# Altium PCB Lite Carrier for Mu.PcbDoc (part 5 of 15)
Units mm, origin at the board's own origin, x right, y up, seen from the top; angles counter-clockwise.
Board outline 146 x 102 mm, 20 copper layers (F.Cu, F.Mask, B.Cu, B.Mask, In1.Cu, F.SilkS, In2.Cu, B.SilkS, F.Adhes, B.Adhes, F.Paste, B.Paste, Dwgs.User, Cmts.User, Eco1.User, Eco2.User, Edge.Cuts, Margin, B.CrtYd, F.CrtYd); 254 components, 382 nets, 1258 pads, 1020 vias.
Unrouted connection lines stored in the file: 113.
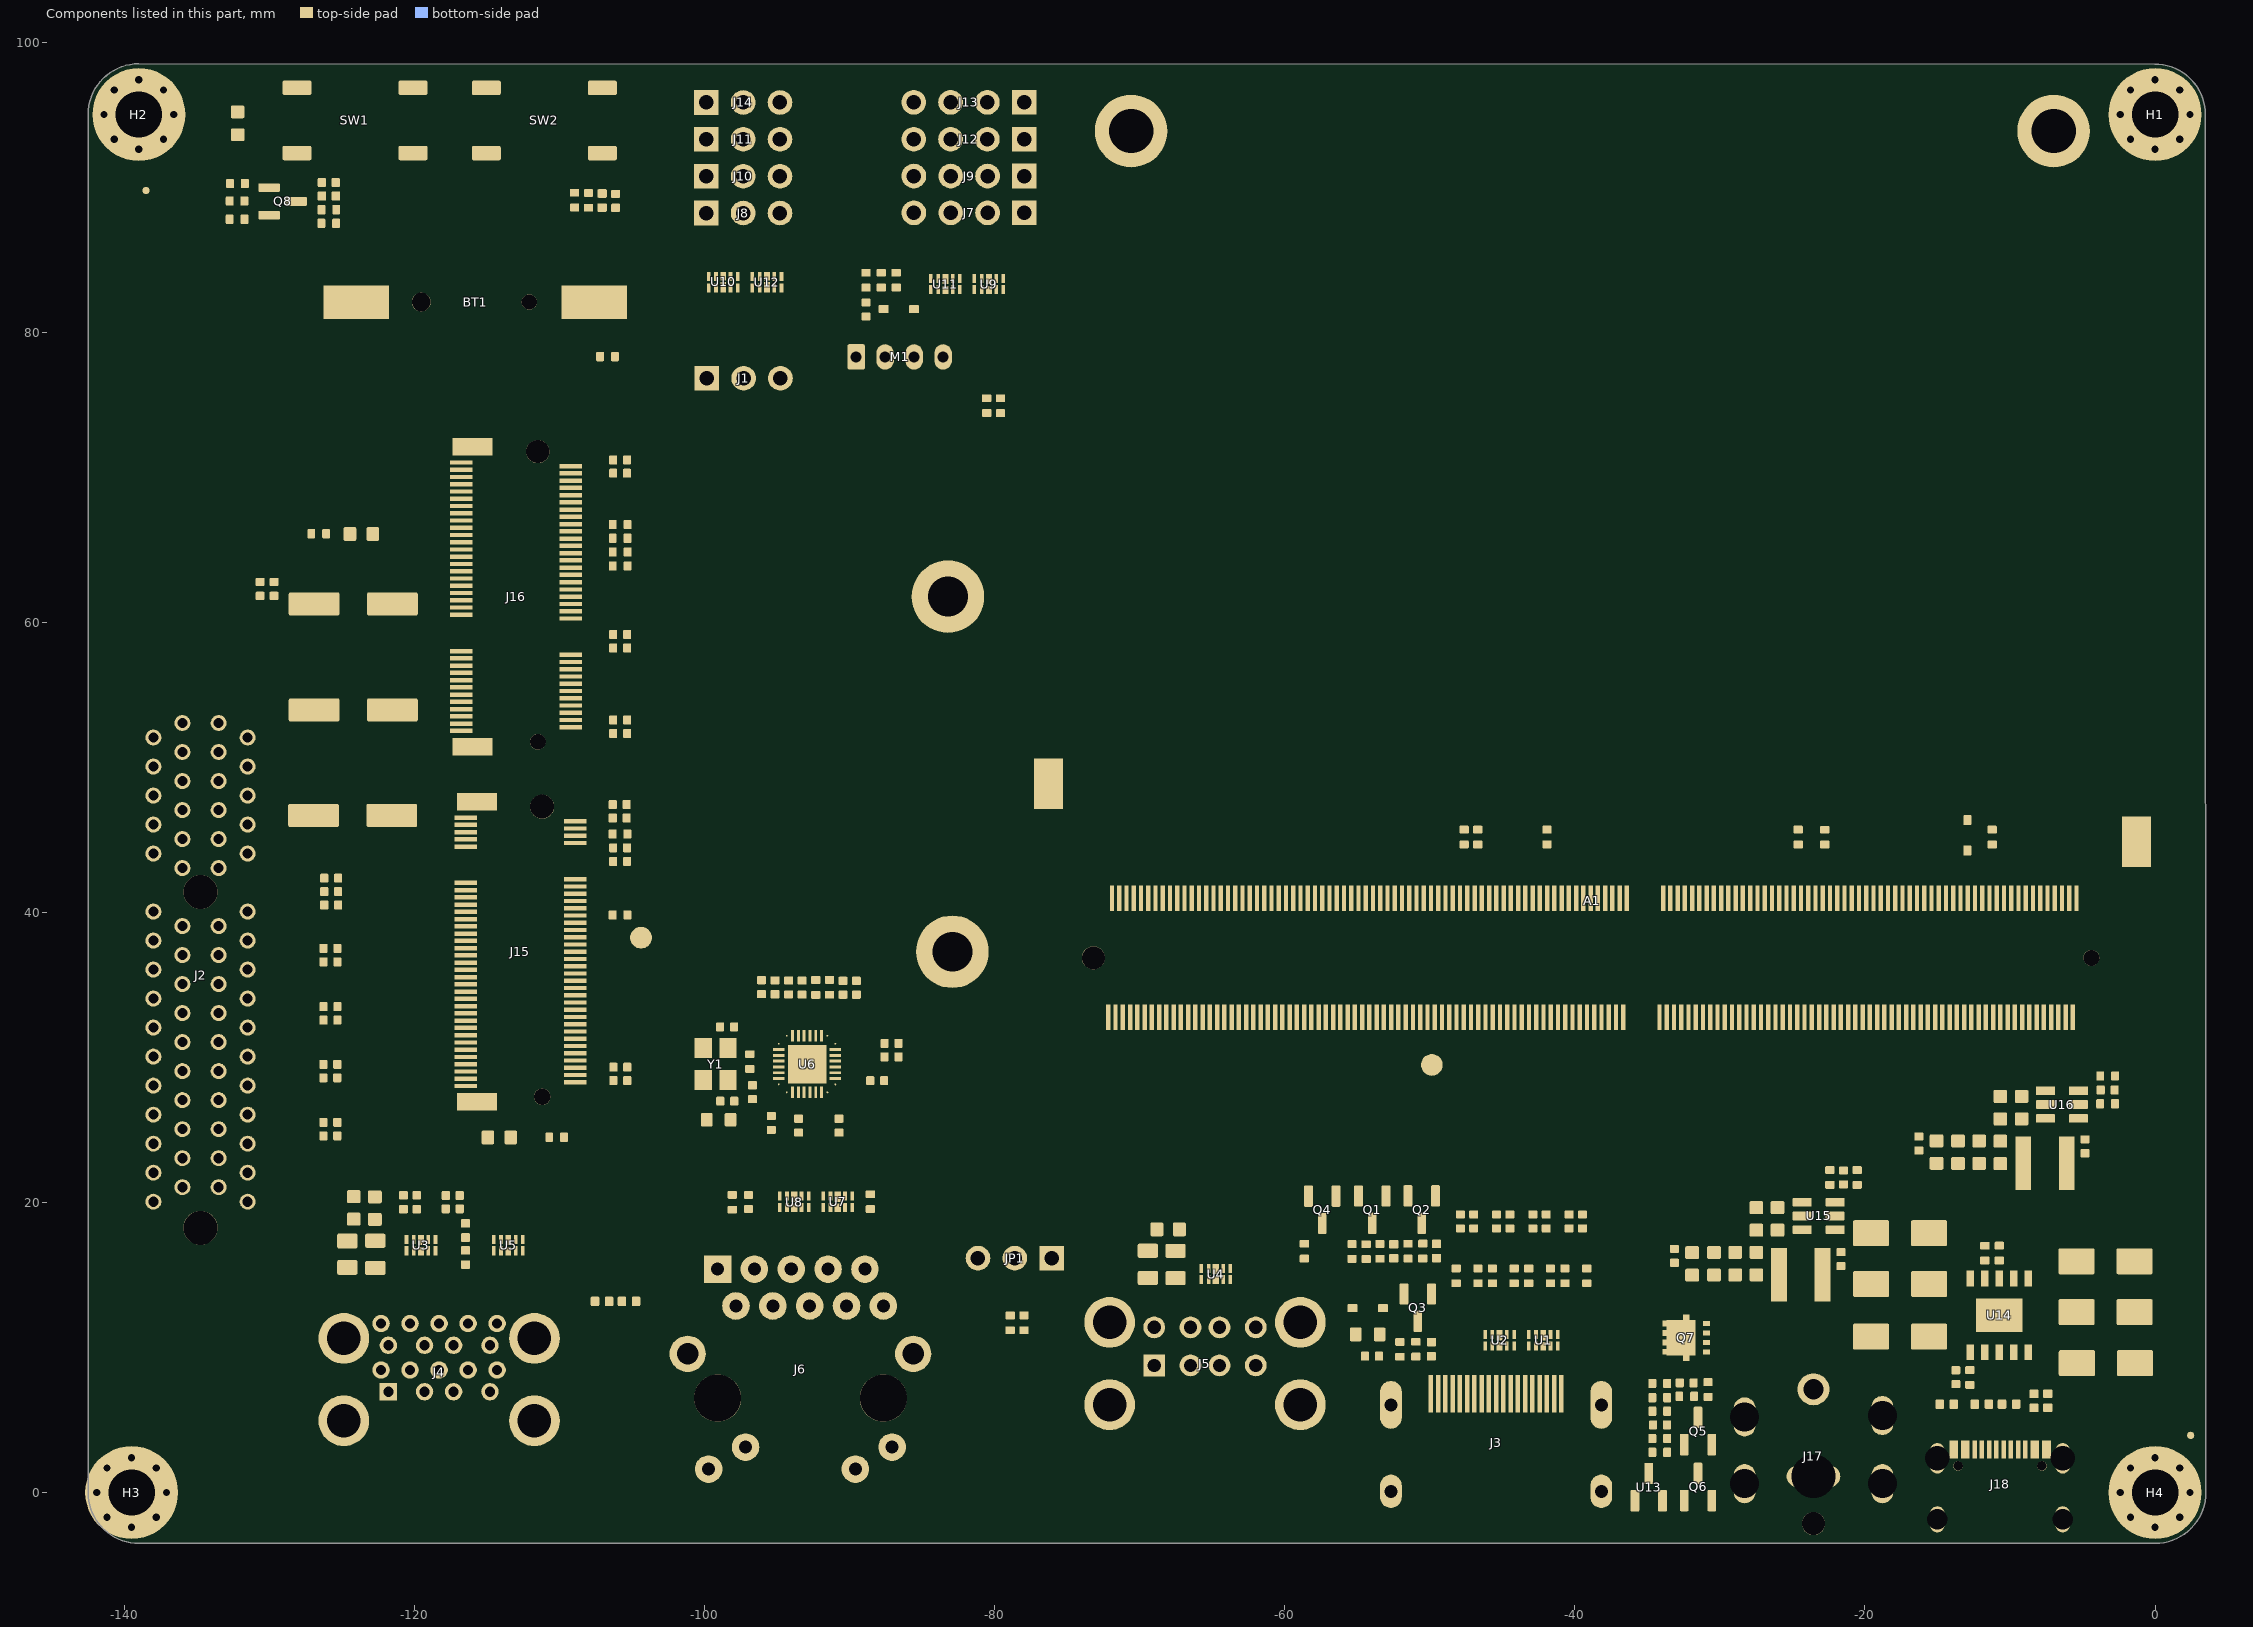
[diagram p16: the components of this part, seen from the top]

## Design rules (kind name [scope] priority, off if disabled: settings) (continued)
PolygonConnect Polygon_F.Cu-+3V3-33_ConnectDirect [IsNamedPolygon('F.Cu-+3V3-33')] p867: connectstyle=Direct reliefconductorwidth=0.254 reliefentries=4 polygonreliefangle="90 Angle" airgapwidth=0.254
PolygonConnect Polygon_F.Cu-GND-67_ConnectDirect [IsNamedPolygon('F.Cu-GND-67')] p868: connectstyle=Direct reliefconductorwidth=0.254 reliefentries=4 polygonreliefangle="90 Angle" airgapwidth=0.254
PolygonConnect "Polygon_F.Cu-/LattePanda Module/USB_2_P7--1_ConnectDirect" [IsNamedPolygon('F.Cu-/LattePanda Module/USB_2_P7--1')] p869: connectstyle=Direct reliefconductorwidth=0.254 reliefentries=4 polygonreliefangle="90 Angle" airgapwidth=0.254
PolygonConnect Polygon_F.Cu-GND-66_ConnectDirect [IsNamedPolygon('F.Cu-GND-66')] p870: connectstyle=Direct reliefconductorwidth=0.254 reliefentries=4 polygonreliefangle="90 Angle" airgapwidth=0.254
PolygonConnect Polygon_F.Cu-/HDMI/TMDS_D2+-3_ConnectDirect [IsNamedPolygon('F.Cu-/HDMI/TMDS_D2+-3')] p871: connectstyle=Direct reliefconductorwidth=0.254 reliefentries=4 polygonreliefangle="90 Angle" airgapwidth=0.254
PolygonConnect Polygon_F.Cu-+5V-2_ConnectDirect [IsNamedPolygon('F.Cu-+5V-2')] p872: connectstyle=Direct reliefconductorwidth=0.254 reliefentries=4 polygonreliefangle="90 Angle" airgapwidth=0.254
PolygonConnect Polygon_F.Cu-GND-65_ConnectDirect [IsNamedPolygon('F.Cu-GND-65')] p873: connectstyle=Direct reliefconductorwidth=0.254 reliefentries=4 polygonreliefangle="90 Angle" airgapwidth=0.254
PolygonConnect Polygon_F.Cu-GND-64_ConnectDirect [IsNamedPolygon('F.Cu-GND-64')] p874: connectstyle=Direct reliefconductorwidth=0.254 reliefentries=4 polygonreliefangle="90 Angle" airgapwidth=0.254
PolygonConnect Polygon_F.Cu-GND-63_ConnectDirect [IsNamedPolygon('F.Cu-GND-63')] p875: connectstyle=Direct reliefconductorwidth=0.254 reliefentries=4 polygonreliefangle="90 Angle" airgapwidth=0.254
PolygonConnect Polygon_F.Cu-Net-(Q7-G)-4_ConnectDirect [IsNamedPolygon('F.Cu-Net-(Q7-G)-4')] p876: connectstyle=Direct reliefconductorwidth=0.254 reliefentries=4 polygonreliefangle="90 Angle" airgapwidth=0.254
PolygonConnect "Polygon_F.Cu-/PCIe x4/PCIE30_TX1_N-1_ConnectDirect" [IsNamedPolygon('F.Cu-/PCIe x4/PCIE30_TX1_N-1')] p877: connectstyle=Direct reliefconductorwidth=0.254 reliefentries=4 polygonreliefangle="90 Angle" airgapwidth=0.254
PolygonConnect Polygon_F.Cu-/GPIO/SOC_UART2_RX-2_ConnectDirect [IsNamedPolygon('F.Cu-/GPIO/SOC_UART2_RX-2')] p878: connectstyle=Direct reliefconductorwidth=0.254 reliefentries=4 polygonreliefangle="90 Angle" airgapwidth=0.254
PolygonConnect "Polygon_F.Cu-/LattePanda Module/HSIO_11_TX-_ConnectDirect" [IsNamedPolygon('F.Cu-/LattePanda Module/HSIO_11_TX-')] p879: connectstyle=Direct reliefconductorwidth=0.254 reliefentries=4 polygonreliefangle="90 Angle" airgapwidth=0.254
PolygonConnect Polygon_F.Cu-Net-(Q1-D)-1_ConnectDirect [IsNamedPolygon('F.Cu-Net-(Q1-D)-1')] p880: connectstyle=Direct reliefconductorwidth=0.254 reliefentries=4 polygonreliefangle="90 Angle" airgapwidth=0.254
PolygonConnect Polygon_F.Cu-/USB2.0&USB3.0/CON_USB3_SSRX_P-1_ConnectDirect [IsNamedPolygon('F.Cu-/USB2.0&USB3.0/CON_USB3_SSRX_P-1')] p881: connectstyle=Direct reliefconductorwidth=0.254 reliefentries=4 polygonreliefangle="90 Angle" airgapwidth=0.254
PolygonConnect Polygon_F.Cu-/USB2.0&USB3.0/CON_USB4_SSTX_N-2_ConnectDirect [IsNamedPolygon('F.Cu-/USB2.0&USB3.0/CON_USB4_SSTX_N-2')] p882: connectstyle=Direct reliefconductorwidth=0.254 reliefentries=4 polygonreliefangle="90 Angle" airgapwidth=0.254
PolygonConnect "Polygon_F.Cu-/LattePanda Module/HSIO_2_TX+-1_ConnectDirect" [IsNamedPolygon('F.Cu-/LattePanda Module/HSIO_2_TX+-1')] p883: connectstyle=Direct reliefconductorwidth=0.254 reliefentries=4 polygonreliefangle="90 Angle" airgapwidth=0.254
PolygonConnect Polygon_F.Cu-/GPIO/I2C4_SCL-2_ConnectDirect [IsNamedPolygon('F.Cu-/GPIO/I2C4_SCL-2')] p884: connectstyle=Direct reliefconductorwidth=0.254 reliefentries=4 polygonreliefangle="90 Angle" airgapwidth=0.254
PolygonConnect Polygon_F.Cu-VPullup-4_ConnectDirect [IsNamedPolygon('F.Cu-VPullup-4')] p885: connectstyle=Direct reliefconductorwidth=0.254 reliefentries=4 polygonreliefangle="90 Angle" airgapwidth=0.254
PolygonConnect Polygon_F.Cu-/USB2.0&USB3.0/CON_USB4_D_P-2_ConnectDirect [IsNamedPolygon('F.Cu-/USB2.0&USB3.0/CON_USB4_D_P-2')] p886: connectstyle=Direct reliefconductorwidth=0.254 reliefentries=4 polygonreliefangle="90 Angle" airgapwidth=0.254
PolygonConnect Polygon_F.Cu-GND-62_ConnectDirect [IsNamedPolygon('F.Cu-GND-62')] p887: connectstyle=Direct reliefconductorwidth=0.254 reliefentries=4 polygonreliefangle="90 Angle" airgapwidth=0.254
PolygonConnect Polygon_F.Cu-GND-61_ConnectDirect [IsNamedPolygon('F.Cu-GND-61')] p888: connectstyle=Direct reliefconductorwidth=0.254 reliefentries=4 polygonreliefangle="90 Angle" airgapwidth=0.254
PolygonConnect Polygon_F.Cu-GND-60_ConnectDirect [IsNamedPolygon('F.Cu-GND-60')] p889: connectstyle=Direct reliefconductorwidth=0.254 reliefentries=4 polygonreliefangle="90 Angle" airgapwidth=0.254
PolygonConnect Polygon_F.Cu-VPullup-3_ConnectDirect [IsNamedPolygon('F.Cu-VPullup-3')] p890: connectstyle=Direct reliefconductorwidth=0.254 reliefentries=4 polygonreliefangle="90 Angle" airgapwidth=0.254
PolygonConnect "Polygon_F.Cu-/LattePanda Module/HSIO_2_RX-_ConnectDirect" [IsNamedPolygon('F.Cu-/LattePanda Module/HSIO_2_RX-')] p891: connectstyle=Direct reliefconductorwidth=0.254 reliefentries=4 polygonreliefangle="90 Angle" airgapwidth=0.254
PolygonConnect "Polygon_F.Cu-/LattePanda Module/REFCLK0-_ConnectDirect" [IsNamedPolygon('F.Cu-/LattePanda Module/REFCLK0-')] p892: connectstyle=Direct reliefconductorwidth=0.254 reliefentries=4 polygonreliefangle="90 Angle" airgapwidth=0.254
PolygonConnect "Polygon_F.Cu-/LattePanda Module/HSIO_1_TX+-1_ConnectDirect" [IsNamedPolygon('F.Cu-/LattePanda Module/HSIO_1_TX+-1')] p893: connectstyle=Direct reliefconductorwidth=0.254 reliefentries=4 polygonreliefangle="90 Angle" airgapwidth=0.254
PolygonConnect Polygon_F.Cu-GND-59_ConnectDirect [IsNamedPolygon('F.Cu-GND-59')] p894: connectstyle=Direct reliefconductorwidth=0.254 reliefentries=4 polygonreliefangle="90 Angle" airgapwidth=0.254
PolygonConnect Polygon_F.Cu-GND-58_ConnectDirect [IsNamedPolygon('F.Cu-GND-58')] p895: connectstyle=Direct reliefconductorwidth=0.254 reliefentries=4 polygonreliefangle="90 Angle" airgapwidth=0.254
PolygonConnect Polygon_F.Cu-Net-(U15-BOOST)_ConnectDirect [IsNamedPolygon('F.Cu-Net-(U15-BOOST)')] p896: connectstyle=Direct reliefconductorwidth=0.254 reliefentries=4 polygonreliefangle="90 Angle" airgapwidth=0.254
PolygonConnect Polygon_F.Cu-/~{WAKE}-5_ConnectDirect [IsNamedPolygon('F.Cu-/~{WAKE}-5')] p897: connectstyle=Direct reliefconductorwidth=0.254 reliefentries=4 polygonreliefangle="90 Angle" airgapwidth=0.254
PolygonConnect Polygon_F.Cu-+3V3-32_ConnectDirect [IsNamedPolygon('F.Cu-+3V3-32')] p898: connectstyle=Direct reliefconductorwidth=0.254 reliefentries=4 polygonreliefangle="90 Angle" airgapwidth=0.254
PolygonConnect "Polygon_F.Cu-/Gigabit Ethernet/LED1_1000-1_ConnectDirect" [IsNamedPolygon('F.Cu-/Gigabit Ethernet/LED1_1000-1')] p899: connectstyle=Direct reliefconductorwidth=0.254 reliefentries=4 polygonreliefangle="90 Angle" airgapwidth=0.254
PolygonConnect Polygon_F.Cu-+BATT-2_ConnectDirect [IsNamedPolygon('F.Cu-+BATT-2')] p900: connectstyle=Direct reliefconductorwidth=0.254 reliefentries=4 polygonreliefangle="90 Angle" airgapwidth=0.254
PolygonConnect Polygon_F.Cu-/USB2.0&USB3.0/CON_USB3_SSTX_N_ConnectDirect [IsNamedPolygon('F.Cu-/USB2.0&USB3.0/CON_USB3_SSTX_N')] p901: connectstyle=Direct reliefconductorwidth=0.254 reliefentries=4 polygonreliefangle="90 Angle" airgapwidth=0.254
PolygonConnect Polygon_F.Cu-/USB2.0&USB3.0/CON_USB4_D_P-1_ConnectDirect [IsNamedPolygon('F.Cu-/USB2.0&USB3.0/CON_USB4_D_P-1')] p902: connectstyle=Direct reliefconductorwidth=0.254 reliefentries=4 polygonreliefangle="90 Angle" airgapwidth=0.254
PolygonConnect "Polygon_F.Cu-/LattePanda Module/HSIO_11_TX+_ConnectDirect" [IsNamedPolygon('F.Cu-/LattePanda Module/HSIO_11_TX+')] p903: connectstyle=Direct reliefconductorwidth=0.254 reliefentries=4 polygonreliefangle="90 Angle" airgapwidth=0.254
PolygonConnect Polygon_F.Cu-/PSU/PWR_C_D+-2_ConnectDirect [IsNamedPolygon('F.Cu-/PSU/PWR_C_D+-2')] p904: connectstyle=Direct reliefconductorwidth=0.254 reliefentries=4 polygonreliefangle="90 Angle" airgapwidth=0.254
PolygonConnect Polygon_F.Cu-+3V3-31_ConnectDirect [IsNamedPolygon('F.Cu-+3V3-31')] p905: connectstyle=Direct reliefconductorwidth=0.254 reliefentries=4 polygonreliefangle="90 Angle" airgapwidth=0.254
PolygonConnect Polygon_F.Cu-/~{PLT_RST}-6_ConnectDirect [IsNamedPolygon('F.Cu-/~{PLT_RST}-6')] p906: connectstyle=Direct reliefconductorwidth=0.254 reliefentries=4 polygonreliefangle="90 Angle" airgapwidth=0.254
PolygonConnect "Polygon_F.Cu-/LattePanda Module/HSIO_2_TX-_ConnectDirect" [IsNamedPolygon('F.Cu-/LattePanda Module/HSIO_2_TX-')] p907: connectstyle=Direct reliefconductorwidth=0.254 reliefentries=4 polygonreliefangle="90 Angle" airgapwidth=0.254
PolygonConnect Polygon_F.Cu-GND-57_ConnectDirect [IsNamedPolygon('F.Cu-GND-57')] p908: connectstyle=Direct reliefconductorwidth=0.254 reliefentries=4 polygonreliefangle="90 Angle" airgapwidth=0.254
PolygonConnect "Polygon_F.Cu-/LattePanda Module/HSIO_10_TX-_ConnectDirect" [IsNamedPolygon('F.Cu-/LattePanda Module/HSIO_10_TX-')] p909: connectstyle=Direct reliefconductorwidth=0.254 reliefentries=4 polygonreliefangle="90 Angle" airgapwidth=0.254
PolygonConnect Polygon_F.Cu-GND-56_ConnectDirect [IsNamedPolygon('F.Cu-GND-56')] p910: connectstyle=Direct reliefconductorwidth=0.254 reliefentries=4 polygonreliefangle="90 Angle" airgapwidth=0.254
PolygonConnect "Polygon_F.Cu-/LattePanda Module/HSIO_9_TX--1_ConnectDirect" [IsNamedPolygon('F.Cu-/LattePanda Module/HSIO_9_TX--1')] p911: connectstyle=Direct reliefconductorwidth=0.254 reliefentries=4 polygonreliefangle="90 Angle" airgapwidth=0.254
PolygonConnect Polygon_F.Cu-/GPIO/SOC_UART2_TX-2_ConnectDirect [IsNamedPolygon('F.Cu-/GPIO/SOC_UART2_TX-2')] p912: connectstyle=Direct reliefconductorwidth=0.254 reliefentries=4 polygonreliefangle="90 Angle" airgapwidth=0.254
PolygonConnect Polygon_F.Cu-/GPIO/SOC_UART2_TX-1_ConnectDirect [IsNamedPolygon('F.Cu-/GPIO/SOC_UART2_TX-1')] p913: connectstyle=Direct reliefconductorwidth=0.254 reliefentries=4 polygonreliefangle="90 Angle" airgapwidth=0.254
PolygonConnect Polygon_F.Cu-/HDMI/DDI_B_HPD-2_ConnectDirect [IsNamedPolygon('F.Cu-/HDMI/DDI_B_HPD-2')] p914: connectstyle=Direct reliefconductorwidth=0.254 reliefentries=4 polygonreliefangle="90 Angle" airgapwidth=0.254
PolygonConnect Polygon_F.Cu-/USB2.0&USB3.0/CON_USB1_D_N-4_ConnectDirect [IsNamedPolygon('F.Cu-/USB2.0&USB3.0/CON_USB1_D_N-4')] p915: connectstyle=Direct reliefconductorwidth=0.254 reliefentries=4 polygonreliefangle="90 Angle" airgapwidth=0.254
PolygonConnect Polygon_F.Cu-+3V3-30_ConnectDirect [IsNamedPolygon('F.Cu-+3V3-30')] p916: connectstyle=Direct reliefconductorwidth=0.254 reliefentries=4 polygonreliefangle="90 Angle" airgapwidth=0.254
PolygonConnect Polygon_F.Cu-Net-(J6-CT)_ConnectDirect [IsNamedPolygon('F.Cu-Net-(J6-CT)')] p917: connectstyle=Direct reliefconductorwidth=0.254 reliefentries=4 polygonreliefangle="90 Angle" airgapwidth=0.254
PolygonConnect Polygon_F.Cu-+12VA_ConnectDirect [IsNamedPolygon('F.Cu-+12VA')] p918: connectstyle=Direct reliefconductorwidth=0.254 reliefentries=4 polygonreliefangle="90 Angle" airgapwidth=0.254
PolygonConnect Polygon_F.Cu-Net-(J16-~{W_DISABLE2})_ConnectDirect [IsNamedPolygon('F.Cu-Net-(J16-~{W_DISABLE2})')] p919: connectstyle=Direct reliefconductorwidth=0.254 reliefentries=4 polygonreliefangle="90 Angle" airgapwidth=0.254
PolygonConnect Polygon_F.Cu-Net-(U15-SW)_ConnectDirect [IsNamedPolygon('F.Cu-Net-(U15-SW)')] p920: connectstyle=Direct reliefconductorwidth=0.254 reliefentries=4 polygonreliefangle="90 Angle" airgapwidth=0.254
PolygonConnect "Polygon_F.Cu-/Gigabit Ethernet/GbE_PCIe_RX+_ConnectDirect" [IsNamedPolygon('F.Cu-/Gigabit Ethernet/GbE_PCIe_RX+')] p921: connectstyle=Direct reliefconductorwidth=0.254 reliefentries=4 polygonreliefangle="90 Angle" airgapwidth=0.254
PolygonConnect Polygon_F.Cu-GND-55_ConnectDirect [IsNamedPolygon('F.Cu-GND-55')] p922: connectstyle=Direct reliefconductorwidth=0.254 reliefentries=4 polygonreliefangle="90 Angle" airgapwidth=0.254
PolygonConnect Polygon_F.Cu-GND-54_ConnectDirect [IsNamedPolygon('F.Cu-GND-54')] p923: connectstyle=Direct reliefconductorwidth=0.254 reliefentries=4 polygonreliefangle="90 Angle" airgapwidth=0.254
PolygonConnect Polygon_F.Cu-/HDMI/TMDS_D0--4_ConnectDirect [IsNamedPolygon('F.Cu-/HDMI/TMDS_D0--4')] p924: connectstyle=Direct reliefconductorwidth=0.254 reliefentries=4 polygonreliefangle="90 Angle" airgapwidth=0.254
PolygonConnect "Polygon_F.Cu-/LattePanda Module/HSIO_11_RX-_ConnectDirect" [IsNamedPolygon('F.Cu-/LattePanda Module/HSIO_11_RX-')] p925: connectstyle=Direct reliefconductorwidth=0.254 reliefentries=4 polygonreliefangle="90 Angle" airgapwidth=0.254
PolygonConnect Polygon_F.Cu-/USB2.0&USB3.0/CON_USB3_SSTX_P-2_ConnectDirect [IsNamedPolygon('F.Cu-/USB2.0&USB3.0/CON_USB3_SSTX_P-2')] p926: connectstyle=Direct reliefconductorwidth=0.254 reliefentries=4 polygonreliefangle="90 Angle" airgapwidth=0.254
PolygonConnect Polygon_F.Cu-/GPIO/I2C3_SCL-3_ConnectDirect [IsNamedPolygon('F.Cu-/GPIO/I2C3_SCL-3')] p927: connectstyle=Direct reliefconductorwidth=0.254 reliefentries=4 polygonreliefangle="90 Angle" airgapwidth=0.254
PolygonConnect Polygon_F.Cu-GND-53_ConnectDirect [IsNamedPolygon('F.Cu-GND-53')] p928: connectstyle=Direct reliefconductorwidth=0.254 reliefentries=4 polygonreliefangle="90 Angle" airgapwidth=0.254
PolygonConnect Polygon_F.Cu-/HDMI/TMDS_D2--1_ConnectDirect [IsNamedPolygon('F.Cu-/HDMI/TMDS_D2--1')] p929: connectstyle=Direct reliefconductorwidth=0.254 reliefentries=4 polygonreliefangle="90 Angle" airgapwidth=0.254
PolygonConnect Polygon_F.Cu-Net-(D9-A)_ConnectDirect [IsNamedPolygon('F.Cu-Net-(D9-A)')] p930: connectstyle=Direct reliefconductorwidth=0.254 reliefentries=4 polygonreliefangle="90 Angle" airgapwidth=0.254
PolygonConnect "Polygon_F.Cu-/LattePanda Module/REFCLK0+_ConnectDirect" [IsNamedPolygon('F.Cu-/LattePanda Module/REFCLK0+')] p931: connectstyle=Direct reliefconductorwidth=0.254 reliefentries=4 polygonreliefangle="90 Angle" airgapwidth=0.254
PolygonConnect Polygon_F.Cu-/PSU/PWR_C_D+-1_ConnectDirect [IsNamedPolygon('F.Cu-/PSU/PWR_C_D+-1')] p932: connectstyle=Direct reliefconductorwidth=0.254 reliefentries=4 polygonreliefangle="90 Angle" airgapwidth=0.254
PolygonConnect Polygon_F.Cu-/USB2.0&USB3.0/CON_USB4_SSRX_N_ConnectDirect [IsNamedPolygon('F.Cu-/USB2.0&USB3.0/CON_USB4_SSRX_N')] p933: connectstyle=Direct reliefconductorwidth=0.254 reliefentries=4 polygonreliefangle="90 Angle" airgapwidth=0.254
PolygonConnect Polygon_F.Cu-GND-52_ConnectDirect [IsNamedPolygon('F.Cu-GND-52')] p934: connectstyle=Direct reliefconductorwidth=0.254 reliefentries=4 polygonreliefangle="90 Angle" airgapwidth=0.254
PolygonConnect Polygon_F.Cu-Net-(Q7-G)-3_ConnectDirect [IsNamedPolygon('F.Cu-Net-(Q7-G)-3')] p935: connectstyle=Direct reliefconductorwidth=0.254 reliefentries=4 polygonreliefangle="90 Angle" airgapwidth=0.254
PolygonConnect Polygon_F.Cu-Net-(D22-A)-1_ConnectDirect [IsNamedPolygon('F.Cu-Net-(D22-A)-1')] p936: connectstyle=Direct reliefconductorwidth=0.254 reliefentries=4 polygonreliefangle="90 Angle" airgapwidth=0.254
PolygonConnect Polygon_F.Cu-GND-51_ConnectDirect [IsNamedPolygon('F.Cu-GND-51')] p937: connectstyle=Direct reliefconductorwidth=0.254 reliefentries=4 polygonreliefangle="90 Angle" airgapwidth=0.254
PolygonConnect Polygon_F.Cu-Net-(M1-PWM)-1_ConnectDirect [IsNamedPolygon('F.Cu-Net-(M1-PWM)-1')] p938: connectstyle=Direct reliefconductorwidth=0.254 reliefentries=4 polygonreliefangle="90 Angle" airgapwidth=0.254
PolygonConnect Polygon_F.Cu-+1V0-5_ConnectDirect [IsNamedPolygon('F.Cu-+1V0-5')] p939: connectstyle=Direct reliefconductorwidth=0.254 reliefentries=4 polygonreliefangle="90 Angle" airgapwidth=0.254
PolygonConnect "Polygon_F.Cu-/M.2 E&M Key/~{CLKREQE}_ConnectDirect" [IsNamedPolygon('F.Cu-/M.2 E&M Key/~{CLKREQE}')] p940: connectstyle=Direct reliefconductorwidth=0.254 reliefentries=4 polygonreliefangle="90 Angle" airgapwidth=0.254
PolygonConnect Polygon_F.Cu-GND-50_ConnectDirect [IsNamedPolygon('F.Cu-GND-50')] p941: connectstyle=Direct reliefconductorwidth=0.254 reliefentries=4 polygonreliefangle="90 Angle" airgapwidth=0.254
PolygonConnect "Polygon_F.Cu-/LattePanda Module/HSIO_1_TX-_ConnectDirect" [IsNamedPolygon('F.Cu-/LattePanda Module/HSIO_1_TX-')] p942: connectstyle=Direct reliefconductorwidth=0.254 reliefentries=4 polygonreliefangle="90 Angle" airgapwidth=0.254
PolygonConnect "Polygon_F.Cu-/PCIe x4/PCIE30_TX0_P-1_ConnectDirect" [IsNamedPolygon('F.Cu-/PCIe x4/PCIE30_TX0_P-1')] p943: connectstyle=Direct reliefconductorwidth=0.254 reliefentries=4 polygonreliefangle="90 Angle" airgapwidth=0.254
PolygonConnect Polygon_F.Cu-/HDMI/TMDS_D0--3_ConnectDirect [IsNamedPolygon('F.Cu-/HDMI/TMDS_D0--3')] p944: connectstyle=Direct reliefconductorwidth=0.254 reliefentries=4 polygonreliefangle="90 Angle" airgapwidth=0.254
PolygonConnect Polygon_F.Cu-/~{WAKE}-4_ConnectDirect [IsNamedPolygon('F.Cu-/~{WAKE}-4')] p945: connectstyle=Direct reliefconductorwidth=0.254 reliefentries=4 polygonreliefangle="90 Angle" airgapwidth=0.254
PolygonConnect Polygon_F.Cu-GND-49_ConnectDirect [IsNamedPolygon('F.Cu-GND-49')] p946: connectstyle=Direct reliefconductorwidth=0.254 reliefentries=4 polygonreliefangle="90 Angle" airgapwidth=0.254
PolygonConnect Polygon_F.Cu-GND-48_ConnectDirect [IsNamedPolygon('F.Cu-GND-48')] p947: connectstyle=Direct reliefconductorwidth=0.254 reliefentries=4 polygonreliefangle="90 Angle" airgapwidth=0.254
PolygonConnect Polygon_F.Cu-/GPIO/I2C4_SCL-1_ConnectDirect [IsNamedPolygon('F.Cu-/GPIO/I2C4_SCL-1')] p948: connectstyle=Direct reliefconductorwidth=0.254 reliefentries=4 polygonreliefangle="90 Angle" airgapwidth=0.254
PolygonConnect Polygon_F.Cu-GND-47_ConnectDirect [IsNamedPolygon('F.Cu-GND-47')] p949: connectstyle=Direct reliefconductorwidth=0.254 reliefentries=4 polygonreliefangle="90 Angle" airgapwidth=0.254
PolygonConnect Polygon_F.Cu-/PSU/PWR_C_D--2_ConnectDirect [IsNamedPolygon('F.Cu-/PSU/PWR_C_D--2')] p950: connectstyle=Direct reliefconductorwidth=0.254 reliefentries=4 polygonreliefangle="90 Angle" airgapwidth=0.254
PolygonConnect Polygon_F.Cu-/USB2.0&USB3.0/CON_USB2_D_N-1_ConnectDirect [IsNamedPolygon('F.Cu-/USB2.0&USB3.0/CON_USB2_D_N-1')] p951: connectstyle=Direct reliefconductorwidth=0.254 reliefentries=4 polygonreliefangle="90 Angle" airgapwidth=0.254
PolygonConnect Polygon_F.Cu-GND-46_ConnectDirect [IsNamedPolygon('F.Cu-GND-46')] p952: connectstyle=Direct reliefconductorwidth=0.254 reliefentries=4 polygonreliefangle="90 Angle" airgapwidth=0.254
PolygonConnect Polygon_F.Cu-Net-(Q5-S)_ConnectDirect [IsNamedPolygon('F.Cu-Net-(Q5-S)')] p953: connectstyle=Direct reliefconductorwidth=0.254 reliefentries=4 polygonreliefangle="90 Angle" airgapwidth=0.254
PolygonConnect Polygon_F.Cu-+3V3-29_ConnectDirect [IsNamedPolygon('F.Cu-+3V3-29')] p954: connectstyle=Direct reliefconductorwidth=0.254 reliefentries=4 polygonreliefangle="90 Angle" airgapwidth=0.254
PolygonConnect Polygon_F.Cu-/HDMI/DDI_B_TX2+_ConnectDirect [IsNamedPolygon('F.Cu-/HDMI/DDI_B_TX2+')] p955: connectstyle=Direct reliefconductorwidth=0.254 reliefentries=4 polygonreliefangle="90 Angle" airgapwidth=0.254
PolygonConnect Polygon_F.Cu-GND-45_ConnectDirect [IsNamedPolygon('F.Cu-GND-45')] p956: connectstyle=Direct reliefconductorwidth=0.254 reliefentries=4 polygonreliefangle="90 Angle" airgapwidth=0.254
PolygonConnect "Polygon_F.Cu-/LattePanda Module/HSIO_1_TX+_ConnectDirect" [IsNamedPolygon('F.Cu-/LattePanda Module/HSIO_1_TX+')] p957: connectstyle=Direct reliefconductorwidth=0.254 reliefentries=4 polygonreliefangle="90 Angle" airgapwidth=0.254
PolygonConnect Polygon_F.Cu-Net-(BT1-+)_ConnectDirect [IsNamedPolygon('F.Cu-Net-(BT1-+)')] p958: connectstyle=Direct reliefconductorwidth=0.254 reliefentries=4 polygonreliefangle="90 Angle" airgapwidth=0.254
PolygonConnect Polygon_F.Cu-/GPIO/I2C2_SDA_ConnectDirect [IsNamedPolygon('F.Cu-/GPIO/I2C2_SDA')] p959: connectstyle=Direct reliefconductorwidth=0.254 reliefentries=4 polygonreliefangle="90 Angle" airgapwidth=0.254
PolygonConnect Polygon_F.Cu-/HDMI/TMDS_D0+-2_ConnectDirect [IsNamedPolygon('F.Cu-/HDMI/TMDS_D0+-2')] p960: connectstyle=Direct reliefconductorwidth=0.254 reliefentries=4 polygonreliefangle="90 Angle" airgapwidth=0.254
PolygonConnect Polygon_F.Cu-GND-44_ConnectDirect [IsNamedPolygon('F.Cu-GND-44')] p961: connectstyle=Direct reliefconductorwidth=0.254 reliefentries=4 polygonreliefangle="90 Angle" airgapwidth=0.254
PolygonConnect Polygon_F.Cu-Net-(Q4-D)-2_ConnectDirect [IsNamedPolygon('F.Cu-Net-(Q4-D)-2')] p962: connectstyle=Direct reliefconductorwidth=0.254 reliefentries=4 polygonreliefangle="90 Angle" airgapwidth=0.254
PolygonConnect Polygon_F.Cu-VDC_ConnectDirect [IsNamedPolygon('F.Cu-VDC')] p963: connectstyle=Direct reliefconductorwidth=0.254 reliefentries=4 polygonreliefangle="90 Angle" airgapwidth=0.254
PolygonConnect "Polygon_F.Cu-/LattePanda Module/HSIO_0_TX-_ConnectDirect" [IsNamedPolygon('F.Cu-/LattePanda Module/HSIO_0_TX-')] p964: connectstyle=Direct reliefconductorwidth=0.254 reliefentries=4 polygonreliefangle="90 Angle" airgapwidth=0.254
PolygonConnect "Polygon_F.Cu-/LattePanda Module/SUSCLK_WIFI-4_ConnectDirect" [IsNamedPolygon('F.Cu-/LattePanda Module/SUSCLK_WIFI-4')] p965: connectstyle=Direct reliefconductorwidth=0.254 reliefentries=4 polygonreliefangle="90 Angle" airgapwidth=0.254
PolygonConnect "Polygon_F.Cu-/PCIe x4/PCIE30_TX2_P_ConnectDirect" [IsNamedPolygon('F.Cu-/PCIe x4/PCIE30_TX2_P')] p966: connectstyle=Direct reliefconductorwidth=0.254 reliefentries=4 polygonreliefangle="90 Angle" airgapwidth=0.254
PolygonConnect Polygon_F.Cu-/USB2.0&USB3.0/CON_USB3_SSRX_N-1_ConnectDirect [IsNamedPolygon('F.Cu-/USB2.0&USB3.0/CON_USB3_SSRX_N-1')] p967: connectstyle=Direct reliefconductorwidth=0.254 reliefentries=4 polygonreliefangle="90 Angle" airgapwidth=0.254
PolygonConnect Polygon_F.Cu-Net-(U6-CKXTAL1)-3_ConnectDirect [IsNamedPolygon('F.Cu-Net-(U6-CKXTAL1)-3')] p968: connectstyle=Direct reliefconductorwidth=0.254 reliefentries=4 polygonreliefangle="90 Angle" airgapwidth=0.254
PolygonConnect Polygon_F.Cu-/HDMI/DDI_B_HPD-1_ConnectDirect [IsNamedPolygon('F.Cu-/HDMI/DDI_B_HPD-1')] p969: connectstyle=Direct reliefconductorwidth=0.254 reliefentries=4 polygonreliefangle="90 Angle" airgapwidth=0.254
PolygonConnect Polygon_F.Cu-GND-43_ConnectDirect [IsNamedPolygon('F.Cu-GND-43')] p970: connectstyle=Direct reliefconductorwidth=0.254 reliefentries=4 polygonreliefangle="90 Angle" airgapwidth=0.254
PolygonConnect Polygon_F.Cu-+3V3-28_ConnectDirect [IsNamedPolygon('F.Cu-+3V3-28')] p971: connectstyle=Direct reliefconductorwidth=0.254 reliefentries=4 polygonreliefangle="90 Angle" airgapwidth=0.254
PolygonConnect Polygon_F.Cu-/HDMI/DDI_B_HPD_ConnectDirect [IsNamedPolygon('F.Cu-/HDMI/DDI_B_HPD')] p972: connectstyle=Direct reliefconductorwidth=0.254 reliefentries=4 polygonreliefangle="90 Angle" airgapwidth=0.254
PolygonConnect Polygon_F.Cu-/HDMI/TMDS_D0+-1_ConnectDirect [IsNamedPolygon('F.Cu-/HDMI/TMDS_D0+-1')] p973: connectstyle=Direct reliefconductorwidth=0.254 reliefentries=4 polygonreliefangle="90 Angle" airgapwidth=0.254
PolygonConnect Polygon_F.Cu-/HDMI/TMDS_D0--2_ConnectDirect [IsNamedPolygon('F.Cu-/HDMI/TMDS_D0--2')] p974: connectstyle=Direct reliefconductorwidth=0.254 reliefentries=4 polygonreliefangle="90 Angle" airgapwidth=0.254
PolygonConnect Polygon_F.Cu-GND-42_ConnectDirect [IsNamedPolygon('F.Cu-GND-42')] p975: connectstyle=Direct reliefconductorwidth=0.254 reliefentries=4 polygonreliefangle="90 Angle" airgapwidth=0.254
PolygonConnect Polygon_F.Cu-+3V3-27_ConnectDirect [IsNamedPolygon('F.Cu-+3V3-27')] p976: connectstyle=Direct reliefconductorwidth=0.254 reliefentries=4 polygonreliefangle="90 Angle" airgapwidth=0.254
PolygonConnect Polygon_F.Cu-/~{PLT_RST}-5_ConnectDirect [IsNamedPolygon('F.Cu-/~{PLT_RST}-5')] p977: connectstyle=Direct reliefconductorwidth=0.254 reliefentries=4 polygonreliefangle="90 Angle" airgapwidth=0.254
PolygonConnect Polygon_F.Cu-+3V3-26_ConnectDirect [IsNamedPolygon('F.Cu-+3V3-26')] p978: connectstyle=Direct reliefconductorwidth=0.254 reliefentries=4 polygonreliefangle="90 Angle" airgapwidth=0.254
PolygonConnect Polygon_F.Cu-Net-(U16-SW)_ConnectDirect [IsNamedPolygon('F.Cu-Net-(U16-SW)')] p979: connectstyle=Direct reliefconductorwidth=0.254 reliefentries=4 polygonreliefangle="90 Angle" airgapwidth=0.254
PolygonConnect Polygon_F.Cu-/HDMI/TMDS_CK--1_ConnectDirect [IsNamedPolygon('F.Cu-/HDMI/TMDS_CK--1')] p980: connectstyle=Direct reliefconductorwidth=0.254 reliefentries=4 polygonreliefangle="90 Angle" airgapwidth=0.254
PolygonConnect Polygon_F.Cu-Net-(M1-PWM)_ConnectDirect [IsNamedPolygon('F.Cu-Net-(M1-PWM)')] p981: connectstyle=Direct reliefconductorwidth=0.254 reliefentries=4 polygonreliefangle="90 Angle" airgapwidth=0.254
PolygonConnect "Polygon_F.Cu-/PCIe x4/PCIE30_TX0_N-1_ConnectDirect" [IsNamedPolygon('F.Cu-/PCIe x4/PCIE30_TX0_N-1')] p982: connectstyle=Direct reliefconductorwidth=0.254 reliefentries=4 polygonreliefangle="90 Angle" airgapwidth=0.254
PolygonConnect Polygon_F.Cu-/~{PWR_LED}{slash}~{PSON}-1_ConnectDirect [IsNamedPolygon('F.Cu-/~{PWR_LED}{slash}~{PSON}-1')] p983: connectstyle=Direct reliefconductorwidth=0.254 reliefentries=4 polygonreliefangle="90 Angle" airgapwidth=0.254
PolygonConnect Polygon_F.Cu-/USB2.0&USB3.0/CON_USB3_D_N_ConnectDirect [IsNamedPolygon('F.Cu-/USB2.0&USB3.0/CON_USB3_D_N')] p984: connectstyle=Direct reliefconductorwidth=0.254 reliefentries=4 polygonreliefangle="90 Angle" airgapwidth=0.254
PolygonConnect Polygon_F.Cu-+3V3-25_ConnectDirect [IsNamedPolygon('F.Cu-+3V3-25')] p985: connectstyle=Direct reliefconductorwidth=0.254 reliefentries=4 polygonreliefangle="90 Angle" airgapwidth=0.254
PolygonConnect Polygon_F.Cu-+3V3-24_ConnectDirect [IsNamedPolygon('F.Cu-+3V3-24')] p986: connectstyle=Direct reliefconductorwidth=0.254 reliefentries=4 polygonreliefangle="90 Angle" airgapwidth=0.254
PolygonConnect Polygon_F.Cu-/PSU/PWR_EN_ConnectDirect [IsNamedPolygon('F.Cu-/PSU/PWR_EN')] p987: connectstyle=Direct reliefconductorwidth=0.254 reliefentries=4 polygonreliefangle="90 Angle" airgapwidth=0.254
PolygonConnect "Polygon_F.Cu-/LattePanda Module/SUSCLK_WIFI-3_ConnectDirect" [IsNamedPolygon('F.Cu-/LattePanda Module/SUSCLK_WIFI-3')] p988: connectstyle=Direct reliefconductorwidth=0.254 reliefentries=4 polygonreliefangle="90 Angle" airgapwidth=0.254
PolygonConnect Polygon_F.Cu-Net-(Q4-D)-1_ConnectDirect [IsNamedPolygon('F.Cu-Net-(Q4-D)-1')] p989: connectstyle=Direct reliefconductorwidth=0.254 reliefentries=4 polygonreliefangle="90 Angle" airgapwidth=0.254
PolygonConnect Polygon_F.Cu-/GPIO/I2C5_SDA_ConnectDirect [IsNamedPolygon('F.Cu-/GPIO/I2C5_SDA')] p990: connectstyle=Direct reliefconductorwidth=0.254 reliefentries=4 polygonreliefangle="90 Angle" airgapwidth=0.254
PolygonConnect Polygon_F.Cu-/GPIO/SOC_UART0_RX-1_ConnectDirect [IsNamedPolygon('F.Cu-/GPIO/SOC_UART0_RX-1')] p991: connectstyle=Direct reliefconductorwidth=0.254 reliefentries=4 polygonreliefangle="90 Angle" airgapwidth=0.254
PolygonConnect Polygon_F.Cu-+3V3-23_ConnectDirect [IsNamedPolygon('F.Cu-+3V3-23')] p992: connectstyle=Direct reliefconductorwidth=0.254 reliefentries=4 polygonreliefangle="90 Angle" airgapwidth=0.254
PolygonConnect Polygon_F.Cu-Net-(D25-A2)-2_ConnectDirect [IsNamedPolygon('F.Cu-Net-(D25-A2)-2')] p993: connectstyle=Direct reliefconductorwidth=0.254 reliefentries=4 polygonreliefangle="90 Angle" airgapwidth=0.254
PolygonConnect Polygon_F.Cu-/HDMI/TMDS_D0--1_ConnectDirect [IsNamedPolygon('F.Cu-/HDMI/TMDS_D0--1')] p994: connectstyle=Direct reliefconductorwidth=0.254 reliefentries=4 polygonreliefangle="90 Angle" airgapwidth=0.254
PolygonConnect "Polygon_F.Cu-/PCIe x4/PCIE30_TX3_P-1_ConnectDirect" [IsNamedPolygon('F.Cu-/PCIe x4/PCIE30_TX3_P-1')] p995: connectstyle=Direct reliefconductorwidth=0.254 reliefentries=4 polygonreliefangle="90 Angle" airgapwidth=0.254
PolygonConnect Polygon_F.Cu-Net-(A1-SIO_UART_TX)_ConnectDirect [IsNamedPolygon('F.Cu-Net-(A1-SIO_UART_TX)')] p996: connectstyle=Direct reliefconductorwidth=0.254 reliefentries=4 polygonreliefangle="90 Angle" airgapwidth=0.254
PolygonConnect "Polygon_F.Cu-/LattePanda Module/HSIO_9_RX+_ConnectDirect" [IsNamedPolygon('F.Cu-/LattePanda Module/HSIO_9_RX+')] p997: connectstyle=Direct reliefconductorwidth=0.254 reliefentries=4 polygonreliefangle="90 Angle" airgapwidth=0.254
PolygonConnect Polygon_F.Cu-/HDMI/TMDS_D1+-1_ConnectDirect [IsNamedPolygon('F.Cu-/HDMI/TMDS_D1+-1')] p998: connectstyle=Direct reliefconductorwidth=0.254 reliefentries=4 polygonreliefangle="90 Angle" airgapwidth=0.254
PolygonConnect "Polygon_F.Cu-/PCIe x4/PCIE30_TX3_N_ConnectDirect" [IsNamedPolygon('F.Cu-/PCIe x4/PCIE30_TX3_N')] p999: connectstyle=Direct reliefconductorwidth=0.254 reliefentries=4 polygonreliefangle="90 Angle" airgapwidth=0.254
PolygonConnect Polygon_F.Cu-Net-(D21-A2)_ConnectDirect [IsNamedPolygon('F.Cu-Net-(D21-A2)')] p1000: connectstyle=Direct reliefconductorwidth=0.254 reliefentries=4 polygonreliefangle="90 Angle" airgapwidth=0.254
PolygonConnect "Polygon_F.Cu-/PCIe x4/PCIE30_TX0_N_ConnectDirect" [IsNamedPolygon('F.Cu-/PCIe x4/PCIE30_TX0_N')] p1001: connectstyle=Direct reliefconductorwidth=0.254 reliefentries=4 polygonreliefangle="90 Angle" airgapwidth=0.254
PolygonConnect Polygon_F.Cu-GND-41_ConnectDirect [IsNamedPolygon('F.Cu-GND-41')] p1002: connectstyle=Direct reliefconductorwidth=0.254 reliefentries=4 polygonreliefangle="90 Angle" airgapwidth=0.254
PolygonConnect Polygon_F.Cu-GND-40_ConnectDirect [IsNamedPolygon('F.Cu-GND-40')] p1003: connectstyle=Direct reliefconductorwidth=0.254 reliefentries=4 polygonreliefangle="90 Angle" airgapwidth=0.254
PolygonConnect Polygon_F.Cu-/USB2.0&USB3.0/CON_USB4_D_N_ConnectDirect [IsNamedPolygon('F.Cu-/USB2.0&USB3.0/CON_USB4_D_N')] p1004: connectstyle=Direct reliefconductorwidth=0.254 reliefentries=4 polygonreliefangle="90 Angle" airgapwidth=0.254
PolygonConnect Polygon_F.Cu-/USB2.0&USB3.0/CON_USB3_SSTX_P-1_ConnectDirect [IsNamedPolygon('F.Cu-/USB2.0&USB3.0/CON_USB3_SSTX_P-1')] p1005: connectstyle=Direct reliefconductorwidth=0.254 reliefentries=4 polygonreliefangle="90 Angle" airgapwidth=0.254
PolygonConnect "Polygon_F.Cu-/PCIe x4/PCIE30_TX1_P_ConnectDirect" [IsNamedPolygon('F.Cu-/PCIe x4/PCIE30_TX1_P')] p1006: connectstyle=Direct reliefconductorwidth=0.254 reliefentries=4 polygonreliefangle="90 Angle" airgapwidth=0.254
PolygonConnect "Polygon_F.Cu-/LattePanda Module/HSIO_10_RX+_ConnectDirect" [IsNamedPolygon('F.Cu-/LattePanda Module/HSIO_10_RX+')] p1007: connectstyle=Direct reliefconductorwidth=0.254 reliefentries=4 polygonreliefangle="90 Angle" airgapwidth=0.254
PolygonConnect Polygon_F.Cu-/USB2.0&USB3.0/CON_USB3_SSRX_N_ConnectDirect [IsNamedPolygon('F.Cu-/USB2.0&USB3.0/CON_USB3_SSRX_N')] p1008: connectstyle=Direct reliefconductorwidth=0.254 reliefentries=4 polygonreliefangle="90 Angle" airgapwidth=0.254
PolygonConnect Polygon_F.Cu-Net-(U6-CKXTAL1)-2_ConnectDirect [IsNamedPolygon('F.Cu-Net-(U6-CKXTAL1)-2')] p1009: connectstyle=Direct reliefconductorwidth=0.254 reliefentries=4 polygonreliefangle="90 Angle" airgapwidth=0.254
PolygonConnect Polygon_F.Cu-Net-(J16-~{W_DISABLE1})_ConnectDirect [IsNamedPolygon('F.Cu-Net-(J16-~{W_DISABLE1})')] p1010: connectstyle=Direct reliefconductorwidth=0.254 reliefentries=4 polygonreliefangle="90 Angle" airgapwidth=0.254
PolygonConnect Polygon_F.Cu-+1V0-4_ConnectDirect [IsNamedPolygon('F.Cu-+1V0-4')] p1011: connectstyle=Direct reliefconductorwidth=0.254 reliefentries=4 polygonreliefangle="90 Angle" airgapwidth=0.254
PolygonConnect Polygon_F.Cu-+3V3-22_ConnectDirect [IsNamedPolygon('F.Cu-+3V3-22')] p1012: connectstyle=Direct reliefconductorwidth=0.254 reliefentries=4 polygonreliefangle="90 Angle" airgapwidth=0.254
PolygonConnect Polygon_F.Cu-+3V3-21_ConnectDirect [IsNamedPolygon('F.Cu-+3V3-21')] p1013: connectstyle=Direct reliefconductorwidth=0.254 reliefentries=4 polygonreliefangle="90 Angle" airgapwidth=0.254
PolygonConnect Polygon_F.Cu-/PSU/PWR_C_D--1_ConnectDirect [IsNamedPolygon('F.Cu-/PSU/PWR_C_D--1')] p1014: connectstyle=Direct reliefconductorwidth=0.254 reliefentries=4 polygonreliefangle="90 Angle" airgapwidth=0.254
PolygonConnect Polygon_F.Cu-+5V-1_ConnectDirect [IsNamedPolygon('F.Cu-+5V-1')] p1015: connectstyle=Direct reliefconductorwidth=0.254 reliefentries=4 polygonreliefangle="90 Angle" airgapwidth=0.254
PolygonConnect Polygon_F.Cu-/~{WAKE}-3_ConnectDirect [IsNamedPolygon('F.Cu-/~{WAKE}-3')] p1016: connectstyle=Direct reliefconductorwidth=0.254 reliefentries=4 polygonreliefangle="90 Angle" airgapwidth=0.254
PolygonConnect "Polygon_F.Cu-/Gigabit Ethernet/MDI2+_ConnectDirect" [IsNamedPolygon('F.Cu-/Gigabit Ethernet/MDI2+')] p1017: connectstyle=Direct reliefconductorwidth=0.254 reliefentries=4 polygonreliefangle="90 Angle" airgapwidth=0.254
PolygonConnect Polygon_F.Cu-Net-(Q8-G)_ConnectDirect [IsNamedPolygon('F.Cu-Net-(Q8-G)')] p1018: connectstyle=Direct reliefconductorwidth=0.254 reliefentries=4 polygonreliefangle="90 Angle" airgapwidth=0.254
PolygonConnect "Polygon_F.Cu-/PCIe x4/PCIE30_TX1_N_ConnectDirect" [IsNamedPolygon('F.Cu-/PCIe x4/PCIE30_TX1_N')] p1019: connectstyle=Direct reliefconductorwidth=0.254 reliefentries=4 polygonreliefangle="90 Angle" airgapwidth=0.254
PolygonConnect Polygon_F.Cu-/GPIO/I2C5_SCL-2_ConnectDirect [IsNamedPolygon('F.Cu-/GPIO/I2C5_SCL-2')] p1020: connectstyle=Direct reliefconductorwidth=0.254 reliefentries=4 polygonreliefangle="90 Angle" airgapwidth=0.254
PolygonConnect "Polygon_F.Cu-/M.2 E&M Key/~{CLKREQM}_ConnectDirect" [IsNamedPolygon('F.Cu-/M.2 E&M Key/~{CLKREQM}')] p1021: connectstyle=Direct reliefconductorwidth=0.254 reliefentries=4 polygonreliefangle="90 Angle" airgapwidth=0.254
PolygonConnect Polygon_F.Cu-Net-(U6-CKXTAL1)-1_ConnectDirect [IsNamedPolygon('F.Cu-Net-(U6-CKXTAL1)-1')] p1022: connectstyle=Direct reliefconductorwidth=0.254 reliefentries=4 polygonreliefangle="90 Angle" airgapwidth=0.254
PolygonConnect Polygon_F.Cu-GND-39_ConnectDirect [IsNamedPolygon('F.Cu-GND-39')] p1023: connectstyle=Direct reliefconductorwidth=0.254 reliefentries=4 polygonreliefangle="90 Angle" airgapwidth=0.254
PolygonConnect Polygon_F.Cu-/HDMI/TMDS_D1+_ConnectDirect [IsNamedPolygon('F.Cu-/HDMI/TMDS_D1+')] p1024: connectstyle=Direct reliefconductorwidth=0.254 reliefentries=4 polygonreliefangle="90 Angle" airgapwidth=0.254
PolygonConnect Polygon_F.Cu-Net-(U12-NC-Pad6)_ConnectDirect [IsNamedPolygon('F.Cu-Net-(U12-NC-Pad6)')] p1025: connectstyle=Direct reliefconductorwidth=0.254 reliefentries=4 polygonreliefangle="90 Angle" airgapwidth=0.254
PolygonConnect "Polygon_F.Cu-/Gigabit Ethernet/GbE_PCIe_CLK+-1_ConnectDirect" [IsNamedPolygon('F.Cu-/Gigabit Ethernet/GbE_PCIe_CLK+-1')] p1026: connectstyle=Direct reliefconductorwidth=0.254 reliefentries=4 polygonreliefangle="90 Angle" airgapwidth=0.254
PolygonConnect Polygon_F.Cu-GND-38_ConnectDirect [IsNamedPolygon('F.Cu-GND-38')] p1027: connectstyle=Direct reliefconductorwidth=0.254 reliefentries=4 polygonreliefangle="90 Angle" airgapwidth=0.254
PolygonConnect Polygon_F.Cu-/HDMI/TMDS_CK+-3_ConnectDirect [IsNamedPolygon('F.Cu-/HDMI/TMDS_CK+-3')] p1028: connectstyle=Direct reliefconductorwidth=0.254 reliefentries=4 polygonreliefangle="90 Angle" airgapwidth=0.254
PolygonConnect Polygon_F.Cu-/HDMI/TMDS_CK+-2_ConnectDirect [IsNamedPolygon('F.Cu-/HDMI/TMDS_CK+-2')] p1029: connectstyle=Direct reliefconductorwidth=0.254 reliefentries=4 polygonreliefangle="90 Angle" airgapwidth=0.254
PolygonConnect "Polygon_F.Cu-/LattePanda Module/HSIO_2_TX+_ConnectDirect" [IsNamedPolygon('F.Cu-/LattePanda Module/HSIO_2_TX+')] p1030: connectstyle=Direct reliefconductorwidth=0.254 reliefentries=4 polygonreliefangle="90 Angle" airgapwidth=0.254
PolygonConnect Polygon_F.Cu-GND-37_ConnectDirect [IsNamedPolygon('F.Cu-GND-37')] p1031: connectstyle=Direct reliefconductorwidth=0.254 reliefentries=4 polygonreliefangle="90 Angle" airgapwidth=0.254
PolygonConnect Polygon_F.Cu-Net-(U6-CKXTAL1)_ConnectDirect [IsNamedPolygon('F.Cu-Net-(U6-CKXTAL1)')] p1032: connectstyle=Direct reliefconductorwidth=0.254 reliefentries=4 polygonreliefangle="90 Angle" airgapwidth=0.254
PolygonConnect Polygon_F.Cu-/GPIO/SOC_UART0_TX-1_ConnectDirect [IsNamedPolygon('F.Cu-/GPIO/SOC_UART0_TX-1')] p1033: connectstyle=Direct reliefconductorwidth=0.254 reliefentries=4 polygonreliefangle="90 Angle" airgapwidth=0.254
PolygonConnect Polygon_F.Cu-GND-36_ConnectDirect [IsNamedPolygon('F.Cu-GND-36')] p1034: connectstyle=Direct reliefconductorwidth=0.254 reliefentries=4 polygonreliefangle="90 Angle" airgapwidth=0.254
PolygonConnect Polygon_F.Cu-/GPIO/SOC_UART0_TX_ConnectDirect [IsNamedPolygon('F.Cu-/GPIO/SOC_UART0_TX')] p1035: connectstyle=Direct reliefconductorwidth=0.254 reliefentries=4 polygonreliefangle="90 Angle" airgapwidth=0.254
PolygonConnect Polygon_F.Cu-GND-35_ConnectDirect [IsNamedPolygon('F.Cu-GND-35')] p1036: connectstyle=Direct reliefconductorwidth=0.254 reliefentries=4 polygonreliefangle="90 Angle" airgapwidth=0.254
PolygonConnect Polygon_F.Cu-+3V3-20_ConnectDirect [IsNamedPolygon('F.Cu-+3V3-20')] p1037: connectstyle=Direct reliefconductorwidth=0.254 reliefentries=4 polygonreliefangle="90 Angle" airgapwidth=0.254
PolygonConnect Polygon_F.Cu-Net-(D25-A2)-1_ConnectDirect [IsNamedPolygon('F.Cu-Net-(D25-A2)-1')] p1038: connectstyle=Direct reliefconductorwidth=0.254 reliefentries=4 polygonreliefangle="90 Angle" airgapwidth=0.254
PolygonConnect Polygon_F.Cu-GND-34_ConnectDirect [IsNamedPolygon('F.Cu-GND-34')] p1039: connectstyle=Direct reliefconductorwidth=0.254 reliefentries=4 polygonreliefangle="90 Angle" airgapwidth=0.254
PolygonConnect Polygon_F.Cu-VPullup-2_ConnectDirect [IsNamedPolygon('F.Cu-VPullup-2')] p1040: connectstyle=Direct reliefconductorwidth=0.254 reliefentries=4 polygonreliefangle="90 Angle" airgapwidth=0.254
PolygonConnect Polygon_F.Cu-Net-(U14-CFG1)_ConnectDirect [IsNamedPolygon('F.Cu-Net-(U14-CFG1)')] p1041: connectstyle=Direct reliefconductorwidth=0.254 reliefentries=4 polygonreliefangle="90 Angle" airgapwidth=0.254
PolygonConnect "Polygon_F.Cu-/LattePanda Module/HSIO_3_TX-_ConnectDirect" [IsNamedPolygon('F.Cu-/LattePanda Module/HSIO_3_TX-')] p1042: connectstyle=Direct reliefconductorwidth=0.254 reliefentries=4 polygonreliefangle="90 Angle" airgapwidth=0.254
PolygonConnect Polygon_F.Cu-+5V_ConnectDirect [IsNamedPolygon('F.Cu-+5V')] p1043: connectstyle=Direct reliefconductorwidth=0.254 reliefentries=4 polygonreliefangle="90 Angle" airgapwidth=0.254
PolygonConnect Polygon_F.Cu-/GPIO/I2C2_SCL_ConnectDirect [IsNamedPolygon('F.Cu-/GPIO/I2C2_SCL')] p1044: connectstyle=Direct reliefconductorwidth=0.254 reliefentries=4 polygonreliefangle="90 Angle" airgapwidth=0.254
PolygonConnect Polygon_F.Cu-/HDMI/TMDS_D0-_ConnectDirect [IsNamedPolygon('F.Cu-/HDMI/TMDS_D0-')] p1045: connectstyle=Direct reliefconductorwidth=0.254 reliefentries=4 polygonreliefangle="90 Angle" airgapwidth=0.254
PolygonConnect "Polygon_F.Cu-/LattePanda Module/HSIO_3_RX--1_ConnectDirect" [IsNamedPolygon('F.Cu-/LattePanda Module/HSIO_3_RX--1')] p1046: connectstyle=Direct reliefconductorwidth=0.254 reliefentries=4 polygonreliefangle="90 Angle" airgapwidth=0.254
PolygonConnect Polygon_F.Cu-+BATT-1_ConnectDirect [IsNamedPolygon('F.Cu-+BATT-1')] p1047: connectstyle=Direct reliefconductorwidth=0.254 reliefentries=4 polygonreliefangle="90 Angle" airgapwidth=0.254
PolygonConnect Polygon_F.Cu-/HDMI/TMDS_D2-_ConnectDirect [IsNamedPolygon('F.Cu-/HDMI/TMDS_D2-')] p1048: connectstyle=Direct reliefconductorwidth=0.254 reliefentries=4 polygonreliefangle="90 Angle" airgapwidth=0.254
PolygonConnect Polygon_F.Cu-GND-33_ConnectDirect [IsNamedPolygon('F.Cu-GND-33')] p1049: connectstyle=Direct reliefconductorwidth=0.254 reliefentries=4 polygonreliefangle="90 Angle" airgapwidth=0.254
PolygonConnect Polygon_F.Cu-Net-(J6-PadL3)-1_ConnectDirect [IsNamedPolygon('F.Cu-Net-(J6-PadL3)-1')] p1050: connectstyle=Direct reliefconductorwidth=0.254 reliefentries=4 polygonreliefangle="90 Angle" airgapwidth=0.254
PolygonConnect Polygon_F.Cu-/GPIO/I2C3_SCL-2_ConnectDirect [IsNamedPolygon('F.Cu-/GPIO/I2C3_SCL-2')] p1051: connectstyle=Direct reliefconductorwidth=0.254 reliefentries=4 polygonreliefangle="90 Angle" airgapwidth=0.254
PolygonConnect "Polygon_F.Cu-/Gigabit Ethernet/MDI1-_ConnectDirect" [IsNamedPolygon('F.Cu-/Gigabit Ethernet/MDI1-')] p1052: connectstyle=Direct reliefconductorwidth=0.254 reliefentries=4 polygonreliefangle="90 Angle" airgapwidth=0.254
PolygonConnect Polygon_F.Cu-/GPIO/SOC_UART0_RX_ConnectDirect [IsNamedPolygon('F.Cu-/GPIO/SOC_UART0_RX')] p1053: connectstyle=Direct reliefconductorwidth=0.254 reliefentries=4 polygonreliefangle="90 Angle" airgapwidth=0.254
PolygonConnect Polygon_F.Cu-GND-32_ConnectDirect [IsNamedPolygon('F.Cu-GND-32')] p1054: connectstyle=Direct reliefconductorwidth=0.254 reliefentries=4 polygonreliefangle="90 Angle" airgapwidth=0.254
PolygonConnect Polygon_F.Cu-GND-31_ConnectDirect [IsNamedPolygon('F.Cu-GND-31')] p1055: connectstyle=Direct reliefconductorwidth=0.254 reliefentries=4 polygonreliefangle="90 Angle" airgapwidth=0.254
PolygonConnect Polygon_F.Cu-/HDMI/DDI_B_TX3-_ConnectDirect [IsNamedPolygon('F.Cu-/HDMI/DDI_B_TX3-')] p1056: connectstyle=Direct reliefconductorwidth=0.254 reliefentries=4 polygonreliefangle="90 Angle" airgapwidth=0.254
PolygonConnect "Polygon_F.Cu-/Gigabit Ethernet/MDI3-_ConnectDirect" [IsNamedPolygon('F.Cu-/Gigabit Ethernet/MDI3-')] p1057: connectstyle=Direct reliefconductorwidth=0.254 reliefentries=4 polygonreliefangle="90 Angle" airgapwidth=0.254
PolygonConnect "Polygon_F.Cu-/Gigabit Ethernet/GbE_PCIe_TX-_ConnectDirect" [IsNamedPolygon('F.Cu-/Gigabit Ethernet/GbE_PCIe_TX-')] p1058: connectstyle=Direct reliefconductorwidth=0.254 reliefentries=4 polygonreliefangle="90 Angle" airgapwidth=0.254
PolygonConnect Polygon_F.Cu-Net-(U13-K)_ConnectDirect [IsNamedPolygon('F.Cu-Net-(U13-K)')] p1059: connectstyle=Direct reliefconductorwidth=0.254 reliefentries=4 polygonreliefangle="90 Angle" airgapwidth=0.254
PolygonConnect Polygon_F.Cu-Net-(D26-A)-1_ConnectDirect [IsNamedPolygon('F.Cu-Net-(D26-A)-1')] p1060: connectstyle=Direct reliefconductorwidth=0.254 reliefentries=4 polygonreliefangle="90 Angle" airgapwidth=0.254
PolygonConnect "Polygon_F.Cu-/Gigabit Ethernet/HSO--1_ConnectDirect" [IsNamedPolygon('F.Cu-/Gigabit Ethernet/HSO--1')] p1061: connectstyle=Direct reliefconductorwidth=0.254 reliefentries=4 polygonreliefangle="90 Angle" airgapwidth=0.254
PolygonConnect "Polygon_F.Cu-/LattePanda Module/SUSCLK_WIFI-2_ConnectDirect" [IsNamedPolygon('F.Cu-/LattePanda Module/SUSCLK_WIFI-2')] p1062: connectstyle=Direct reliefconductorwidth=0.254 reliefentries=4 polygonreliefangle="90 Angle" airgapwidth=0.254
PolygonConnect Polygon_F.Cu-/HDMI/TMDS_CK+-1_ConnectDirect [IsNamedPolygon('F.Cu-/HDMI/TMDS_CK+-1')] p1063: connectstyle=Direct reliefconductorwidth=0.254 reliefentries=4 polygonreliefangle="90 Angle" airgapwidth=0.254
PolygonConnect Polygon_F.Cu-/Fan_Temp/FAN_1_TAC-1_ConnectDirect [IsNamedPolygon('F.Cu-/Fan_Temp/FAN_1_TAC-1')] p1064: connectstyle=Direct reliefconductorwidth=0.254 reliefentries=4 polygonreliefangle="90 Angle" airgapwidth=0.254
PolygonConnect Polygon_F.Cu-/USB2.0&USB3.0/CON_USB4_SSTX_P_ConnectDirect [IsNamedPolygon('F.Cu-/USB2.0&USB3.0/CON_USB4_SSTX_P')] p1065: connectstyle=Direct reliefconductorwidth=0.254 reliefentries=4 polygonreliefangle="90 Angle" airgapwidth=0.254
PolygonConnect "Polygon_F.Cu-/LattePanda Module/HSIO_9_RX-_ConnectDirect" [IsNamedPolygon('F.Cu-/LattePanda Module/HSIO_9_RX-')] p1066: connectstyle=Direct reliefconductorwidth=0.254 reliefentries=4 polygonreliefangle="90 Angle" airgapwidth=0.254
PolygonConnect Polygon_F.Cu-+3V3-19_ConnectDirect [IsNamedPolygon('F.Cu-+3V3-19')] p1067: connectstyle=Direct reliefconductorwidth=0.254 reliefentries=4 polygonreliefangle="90 Angle" airgapwidth=0.254
PolygonConnect Polygon_F.Cu-+3V3-18_ConnectDirect [IsNamedPolygon('F.Cu-+3V3-18')] p1068: connectstyle=Direct reliefconductorwidth=0.254 reliefentries=4 polygonreliefangle="90 Angle" airgapwidth=0.254
PolygonConnect Polygon_F.Cu-Net-(U6-ISOLATEB)_ConnectDirect [IsNamedPolygon('F.Cu-Net-(U6-ISOLATEB)')] p1069: connectstyle=Direct reliefconductorwidth=0.254 reliefentries=4 polygonreliefangle="90 Angle" airgapwidth=0.254
PolygonConnect Polygon_F.Cu-/USB2.0&USB3.0/CON_USB4_SSTX_N-1_ConnectDirect [IsNamedPolygon('F.Cu-/USB2.0&USB3.0/CON_USB4_SSTX_N-1')] p1070: connectstyle=Direct reliefconductorwidth=0.254 reliefentries=4 polygonreliefangle="90 Angle" airgapwidth=0.254
PolygonConnect Polygon_F.Cu-/USB2.0&USB3.0/CON_USB4_SSTX_N_ConnectDirect [IsNamedPolygon('F.Cu-/USB2.0&USB3.0/CON_USB4_SSTX_N')] p1071: connectstyle=Direct reliefconductorwidth=0.254 reliefentries=4 polygonreliefangle="90 Angle" airgapwidth=0.254
PolygonConnect Polygon_F.Cu-GND-30_ConnectDirect [IsNamedPolygon('F.Cu-GND-30')] p1072: connectstyle=Direct reliefconductorwidth=0.254 reliefentries=4 polygonreliefangle="90 Angle" airgapwidth=0.254
PolygonConnect Polygon_F.Cu-/PSU/CC1_ConnectDirect [IsNamedPolygon('F.Cu-/PSU/CC1')] p1073: connectstyle=Direct reliefconductorwidth=0.254 reliefentries=4 polygonreliefangle="90 Angle" airgapwidth=0.254
PolygonConnect "Polygon_F.Cu-/LattePanda Module/HSIO_9_TX+_ConnectDirect" [IsNamedPolygon('F.Cu-/LattePanda Module/HSIO_9_TX+')] p1074: connectstyle=Direct reliefconductorwidth=0.254 reliefentries=4 polygonreliefangle="90 Angle" airgapwidth=0.254
PolygonConnect Polygon_F.Cu-/USB2.0&USB3.0/CON_USB4_SSRX_P_ConnectDirect [IsNamedPolygon('F.Cu-/USB2.0&USB3.0/CON_USB4_SSRX_P')] p1075: connectstyle=Direct reliefconductorwidth=0.254 reliefentries=4 polygonreliefangle="90 Angle" airgapwidth=0.254
PolygonConnect "Polygon_F.Cu-/LattePanda Module/HSIO_8_RX+_ConnectDirect" [IsNamedPolygon('F.Cu-/LattePanda Module/HSIO_8_RX+')] p1076: connectstyle=Direct reliefconductorwidth=0.254 reliefentries=4 polygonreliefangle="90 Angle" airgapwidth=0.254
PolygonConnect "Polygon_F.Cu-/LattePanda Module/HSIO_10_TX+_ConnectDirect" [IsNamedPolygon('F.Cu-/LattePanda Module/HSIO_10_TX+')] p1077: connectstyle=Direct reliefconductorwidth=0.254 reliefentries=4 polygonreliefangle="90 Angle" airgapwidth=0.254
PolygonConnect "Polygon_F.Cu-/LattePanda Module/HSIO_8_TX+-1_ConnectDirect" [IsNamedPolygon('F.Cu-/LattePanda Module/HSIO_8_TX+-1')] p1078: connectstyle=Direct reliefconductorwidth=0.254 reliefentries=4 polygonreliefangle="90 Angle" airgapwidth=0.254
PolygonConnect Polygon_F.Cu-/~{PLT_RST}-4_ConnectDirect [IsNamedPolygon('F.Cu-/~{PLT_RST}-4')] p1079: connectstyle=Direct reliefconductorwidth=0.254 reliefentries=4 polygonreliefangle="90 Angle" airgapwidth=0.254
PolygonConnect Polygon_F.Cu-Net-(D25-A2)_ConnectDirect [IsNamedPolygon('F.Cu-Net-(D25-A2)')] p1080: connectstyle=Direct reliefconductorwidth=0.254 reliefentries=4 polygonreliefangle="90 Angle" airgapwidth=0.254
PolygonConnect Polygon_F.Cu-Net-(J6-PadL1)_ConnectDirect [IsNamedPolygon('F.Cu-Net-(J6-PadL1)')] p1081: connectstyle=Direct reliefconductorwidth=0.254 reliefentries=4 polygonreliefangle="90 Angle" airgapwidth=0.254
PolygonConnect "Polygon_F.Cu-/Gigabit Ethernet/HSO-_ConnectDirect" [IsNamedPolygon('F.Cu-/Gigabit Ethernet/HSO-')] p1082: connectstyle=Direct reliefconductorwidth=0.254 reliefentries=4 polygonreliefangle="90 Angle" airgapwidth=0.254
PolygonConnect Polygon_F.Cu-+3V3-17_ConnectDirect [IsNamedPolygon('F.Cu-+3V3-17')] p1083: connectstyle=Direct reliefconductorwidth=0.254 reliefentries=4 polygonreliefangle="90 Angle" airgapwidth=0.254
PolygonConnect Polygon_F.Cu-GND-29_ConnectDirect [IsNamedPolygon('F.Cu-GND-29')] p1084: connectstyle=Direct reliefconductorwidth=0.254 reliefentries=4 polygonreliefangle="90 Angle" airgapwidth=0.254
PolygonConnect Polygon_F.Cu-Net-(D22-A)_ConnectDirect [IsNamedPolygon('F.Cu-Net-(D22-A)')] p1085: connectstyle=Direct reliefconductorwidth=0.254 reliefentries=4 polygonreliefangle="90 Angle" airgapwidth=0.254
PolygonConnect Polygon_F.Cu-GND-28_ConnectDirect [IsNamedPolygon('F.Cu-GND-28')] p1086: connectstyle=Direct reliefconductorwidth=0.254 reliefentries=4 polygonreliefangle="90 Angle" airgapwidth=0.254
PolygonConnect Polygon_F.Cu-/HDMI/HPD-3_ConnectDirect [IsNamedPolygon('F.Cu-/HDMI/HPD-3')] p1087: connectstyle=Direct reliefconductorwidth=0.254 reliefentries=4 polygonreliefangle="90 Angle" airgapwidth=0.254
PolygonConnect Polygon_F.Cu-Net-(J5-VBUS2)_ConnectDirect [IsNamedPolygon('F.Cu-Net-(J5-VBUS2)')] p1088: connectstyle=Direct reliefconductorwidth=0.254 reliefentries=4 polygonreliefangle="90 Angle" airgapwidth=0.254